# Altium PCB v2.1.1.PcbDoc
Units mm, origin at the board's own origin, x right, y up, seen from the top; angles counter-clockwise.
Board outline 166.23 x 128 mm, 2 copper layers (Top Layer, Bottom Layer); 85 components, 189 nets, 341 pads, 164 vias.
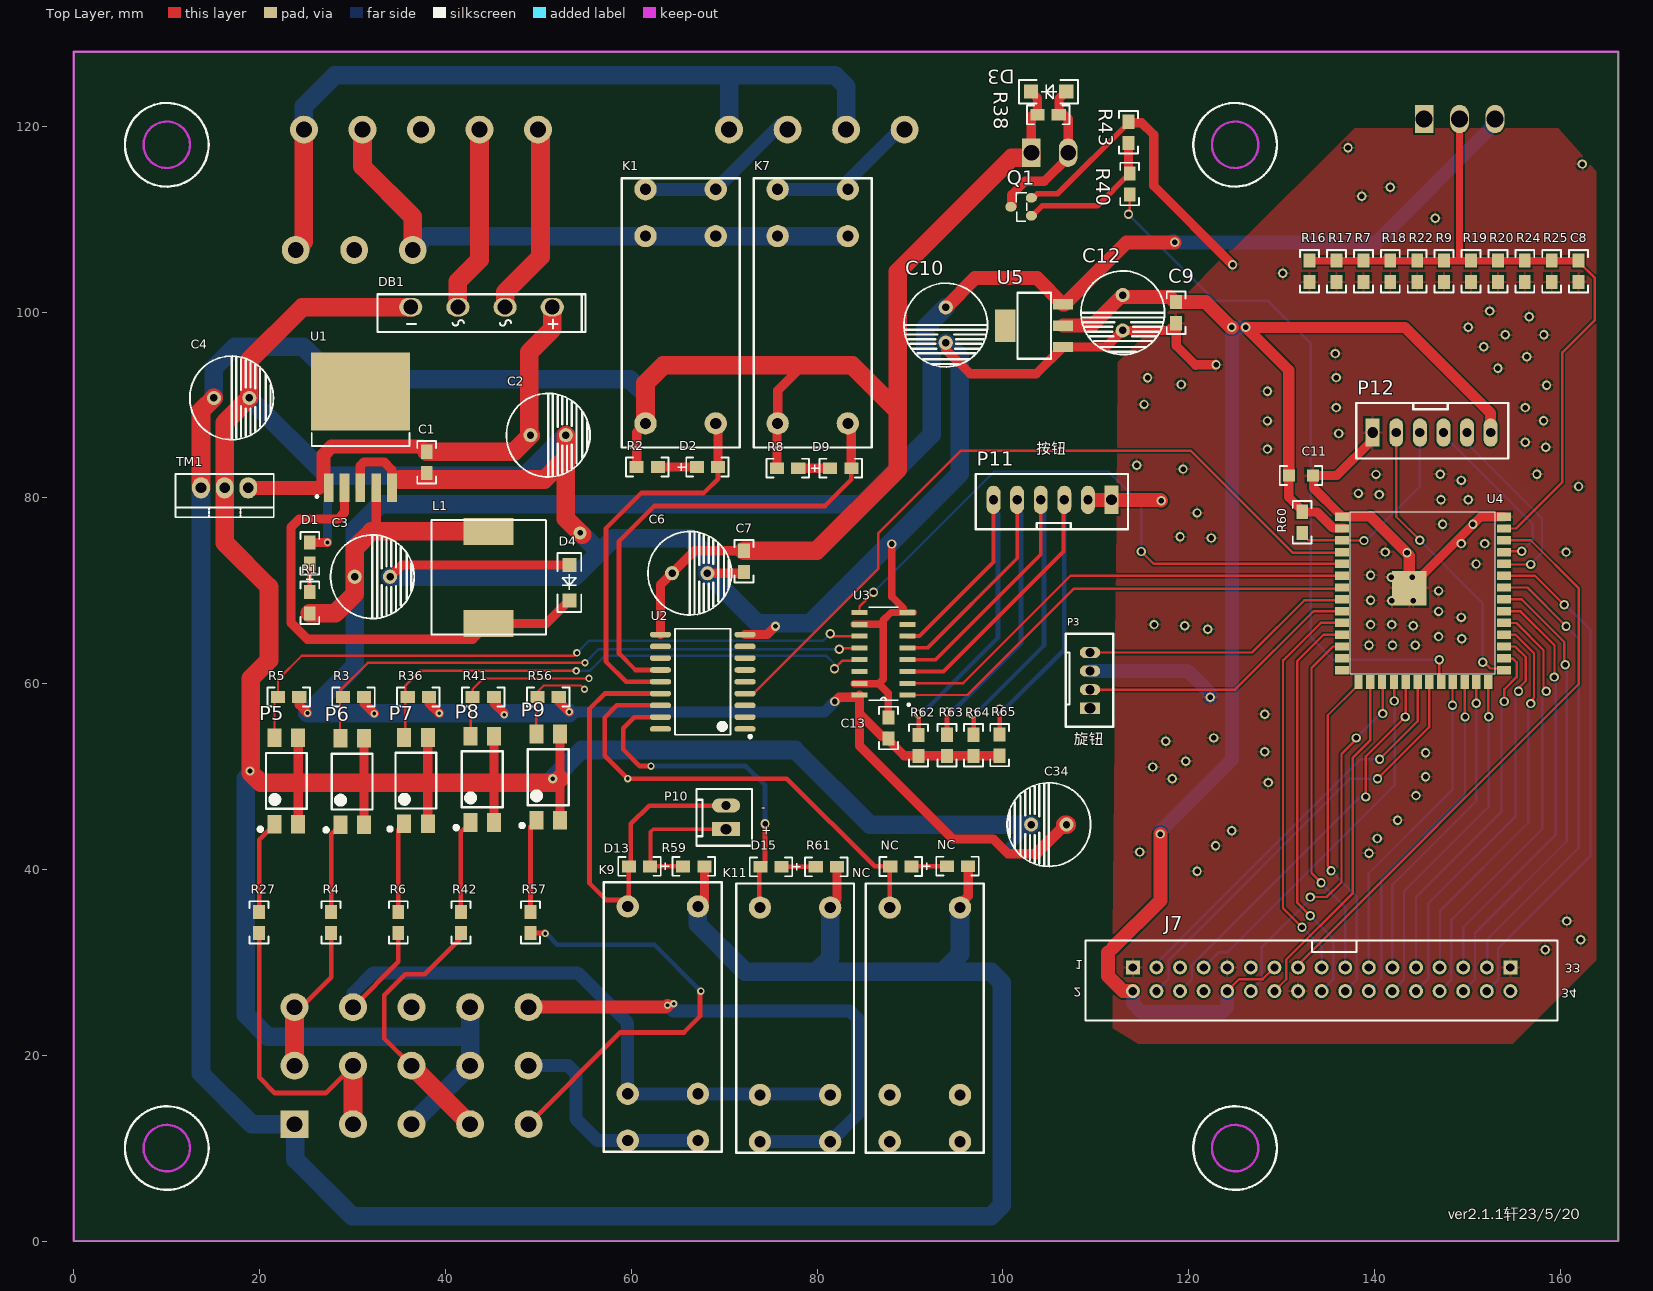
[diagram p0: Top Layer view]
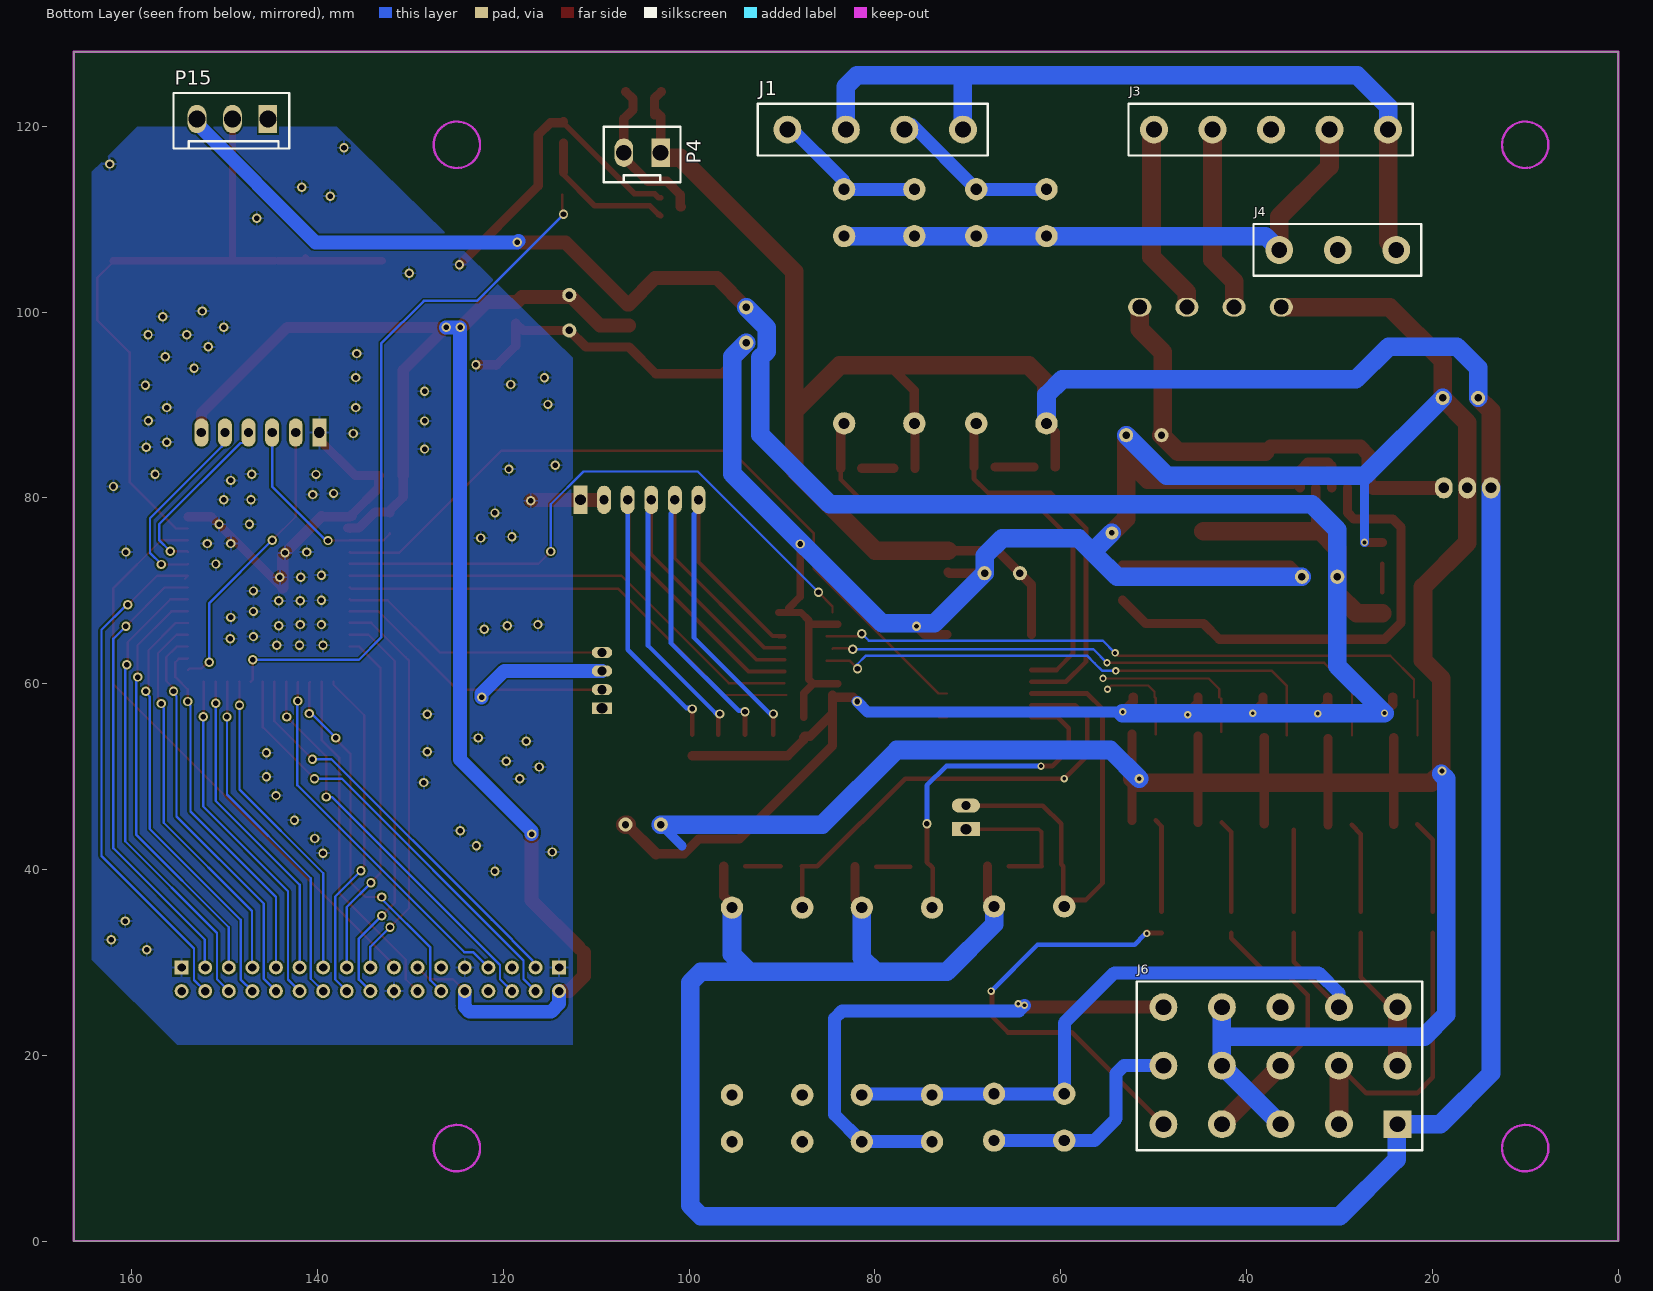
[diagram p1: Bottom Layer view, seen from below]

## Layer stack, top to bottom
Top Solder: solder mask 0.0102, Solder Resist, Dk 3.5
Top Layer: signal copper 0.0356
Dielectric1: dielectric 0.32, FR-4, Dk 4.8
Bottom Layer: signal copper 0.0356
Bottom Solder: solder mask 0.0102, Solder Resist, Dk 3.5

## Board outline
0,0 0,128 166.225,128 166.225,0

## Design rules (kind name [scope] priority, off if disabled: settings)
Clearance [All] p1: gap=0.2 ignorepadtopadclearanceinfootprint=FALSE except(0: Arc-Hole Track-Hole SMDPad-Hole THPad-Hole Via-Hole Fill-Hole Poly-Hole Region-Hole Text-Hole)
ComponentClearance [All] p1 off: gap=0.254 collisioncheckmode=3 verticalgap=0.254 showdistances=FALSE
PlaneConnect [All] p1: planeconnectstyle=Direct reliefexpansion=0.508 reliefentries=4 reliefconductorwidth=0.254 reliefairgap=0.254
PolygonConnect [All] p1: connectstyle=Relief reliefconductorwidth=0.254 reliefentries=4 polygonreliefangle="90 Angle" airgapwidth=0.254
RoutingVias [All] p1: holewidth=0.711 width=1.27 viastyle="Through Hole" minholewidth=0.711 minwidth=1.27 maxholewidth=0.711 maxwidth=1.27
SilkToSolderMaskClearance SilkscreenOverComponentPads [IsPad] p1: minsilkscreentomaskgap=0.254 clearancetoexposedcopper=TRUE
SolderMaskExpansion [All] p1: expansion=0.102 istentingtop=FALSE
Width [All] p1: maxlimit=5 minlimit=0.254 preferedwidth=0.3 minimp=50.000000 maximp=50.000000 favimp=50.000000
27 further rules are at their usual default settings.

## Classes and differential pairs
component class Drive: C1 C2 C3 C4 C6 C7 C8 C9 C10 C12 C34 D1 D2 D3 D4 D9 D13 D15 DB1 J1 J3 J4 J6 K1 K7 K9 K11 L1 P4 P5 P6 P7 P8 P9 P15 Q1 R2 R3 R4 R5 R6 R7 R8 R9 R16 R17 R18 R19 R20 R22 R24 R25 R27 R36 R38 R40 R41 R42 R43 R56 R57 R59 R61 TM1 U1 U2 U5

## Components (designator, comment, footprint, x,y, rotation, side; value= is the part's Value field where it differs from the comment)
C1 "104" 0805#1 37.973,82.677 r90 top
C2 "470UF/50V" CD9 50.8,86.741 r90 top value=470uF
C3 "220uF/50V" CD9 31.877,71.501 r90 top value=470uF
C4 "470UF/50V" CD9 16.725,90.75 r90 top value=470uF
C6 "220uF/50V" CD9 66.04,71.882 r90 top value=470uF
C7 "104" 0805#1 72.136,72.009 r90 top
C8 "103" 0805#1 161.971,103.244 r90 top
C9 "104" 0805#1 118.65,101.075 r270 top
C10 "470UF/50V" CD9 93.85,98.85 r0 top
C11 "104" 0805#2 133.233,82.39 r180 top (schematic designator C3)
C12 "470UF/50V" CD9 112.9,100.175 r0 top locked
C13 "104" 0805#1 87.675,56.361 r270 top (schematic designator C9)
C34 "470UF/50V" CD9 105.199,44.825 r270 top value=470uF
D1 "04" LED-T 25.527,74.041 r90 top
D2 "04" LED-T 68.199,83.185 r0 top
D3 "IN4148" DO-214AC 103.9,124.1 r90 top
D4 "IN5819" DO-214AC 52.959,69.85 r180 top
D9 "04" LED-T 82.55,83.058 r0 top
D13 "04" LED-T 60.885,40.455 r180 top
D15 "04" LED-T 75.037,40.405 r180 top
DB1 "DB157S" LC-GBU 43.875,100.525 r0 top
J1 "CON4" 4PIN-6.3 70.525,119.634 r0 bottom
J3 "变压器入" 5PIN-6.3 24.765,119.634 r0 bottom
J4 "220V供电" 3PIN-6.3 23.876,106.68 r0 bottom
J6 "3*15JR" 3*5PIN-6.3 23.749,12.573 r0 bottom
J7 "header34" "PCBComponent_1 - duplicate" 161.64,140.85 r180 top locked
K1 "HF115F/024-1HS3" HF115FA 69.088,88.011 r90 top
K7 "HF115F/024-1HS3" HF115FA 83.312,88.011 r90 top
K9 "HF115F/024-1HS3" HF115FA 59.615,36.01 r270 top locked
K11 "HF115F/024-1HS3" HF115FA 73.85,35.885 r270 top
L1 "330uH" SMD331 38.481,65.278 r0 top
NC "HF115F/024-1HS3" HF115FA 87.825,35.885 r270 top (schematic designator K11)
NC "04" LED-T 89.025,40.45 r180 top (schematic designator D15)
NC "10k" 0805#1 93.975,40.35 r0 top value=10K (schematic designator R61)
P3 "Header4" "4PIN 2.0" 104.025,55.35 r90 top
P4 "Header 2" "2PIN 3.96" 107.025,117.15 r0 bottom
P5 "PC817" LC-SMD-4 22.875,49.525 r90 top
P6 "PC817" LC-SMD-4 29.95,49.45 r90 top
P7 "PC817" LC-SMD-4 36.825,49.55 r90 top
P8 "PC817" LC-SMD-4 43.95,49.7 r90 top
P9 "PC817" LC-SMD-4 51.05,49.925 r90 top
P10 "Header 2" "2PIN 2.54" 70.2,45.6 r90 top (schematic designator P2)
P11 "Header 6" PCBComponent_1 152.335,79.175 r180 top
P12 "Comment" PCBComponent_1 99.165,87.625 r0 top
P15 "Header 3" "3PIN 3.96" 149.155,120.775 r0 bottom
Q1 "8050" "SOT-23 - duplicate" 101.9,111.275 r90 top
R1 "2K" 0805#1 25.4,69.85 r270 top
R2 "10k" 0805#1 62.865,83.312 r180 top value=10K
R3 "10k" 0805#1 28.956,58.547 r0 top value=10K
R4 "4.7K" 0805#1 27.686,33.147 r90 top
R5 "10k" 0805#1 21.971,58.547 r0 top value=10K
R6 "4.7K" 0805#1 34.925,33.147 r90 top
R7 "47K" 0805#1 138.806,103.244 r90 top
R8 "10k" 0805#1 77.978,83.185 r180 top value=10K
R9 "47K" 0805#1 147.493,103.244 r90 top
R16 "47K" 0805#1 133.015,103.244 r90 top
R17 "47K" 0805#1 135.911,103.244 r90 top
R18 "47K" 0805#1 141.702,103.244 r90 top
R19 "47K" 0805#1 150.389,103.244 r90 top
R20 "47K" 0805#1 153.284,103.244 r90 top
R22 "47K" 0805#1 144.597,103.244 r90 top
R24 "47K" 0805#1 156.18,103.244 r90 top
R25 "47K" 0805#1 159.075,103.244 r90 top
R27 "4.7K" 0805#1 19.939,33.147 r90 top
R36 "10k" 0805#1 35.941,58.547 r0 top value=10K
R38 "10K" 0805#1 106.011,121.225 r180 top value="RT0603BRD071KL YAGEO"
R40 "470" 0805#1 113.65,112.639 r90 top value="RT0603BRD071KL YAGEO"
R41 "10k" 0805#1 42.926,58.547 r0 top value=10K
R42 "4.7K" 0805#1 41.656,33.147 r90 top
R43 "10K" 0805#1 113.525,120.486 r270 top value="RT0603BRD071KL YAGEO"
R56 "10k" 0805#1 49.911,58.547 r0 top value=10K
R57 "4.7K" 0805#1 49.149,33.147 r90 top
R59 "10k" 0805#1 65.584,40.328 r0 top value=10K
R60 "10k" 0805#1 132.219,76.216 r90 top value=10K (schematic designator R59)
R61 "10k" 0805#1 79.863,40.278 r0 top value=10K
R62 "10k" 0805#1 90.925,52.2 r90 top value=10K (schematic designator R60)
R63 "10k" 0805#1 93.988,52.214 r90 top value=10K (schematic designator R60)
R64 "10k" 0805#1 96.85,52.214 r90 top value=10K (schematic designator R60)
R65 "10k" 0805#1 99.65,52.242 r90 top value=10K (schematic designator R60)
TM1 "LM7824CT" TO-220 16.225,81.075 r180 top
U1 "LM2575-5" D2PAK 37.211,89.535 r90 top
U2 "ULN2803" SOP-18_300mil 67.691,60.198 r90 top
U3 "SN74HC165D" 74HC165 87.15,62.575 r180 top
U4 "ESP32-S3-WROOM-1U-N8R8" ESP32-S3-WROOM-1U 141.464,73.393 r0 top locked
U5 "AMS1117-3.3_C166063" SOT-223_L6.7-W3.5-P2.30-BR 103.375,98.525 r0 top

## Footprints (in the part's own frame and the unit in brackets; to place one, negate y for a bottom-side part, rotate by r counter-clockwise, add the part's x,y. Pads: shape width x height; smd on the part's side, far side on the other; paste and mask are expansions set on the pad)
"2PIN 2.54" [mm]
  rect 1.5x3.048 hole 1.143: 1(-1.27,0)
  oval 1.5x3.048 hole 1: 2(1.27,0)
  silkscreen extent -3.05,-2.79 3.05,3.18
"2PIN 3.96" [mm]
  rect 2x3.048 hole 1.7: 1(-3.96,0)
  oval 2x3.048 hole 1.7: 2(0,0)
  silkscreen extent -6.1,-2.79 2.16,3.17
3*5PIN-6.3 [mm]
  rect 3x3 hole 1.7: 1(0,0)
  round 3 hole 1.7: 2(6.3,0) 3(12.6,0) 4(18.9,0) 5(25.2,0) 6(0,-6.3) 7(6.3,-6.3) 8(12.6,-6.3) 9(18.9,-6.3) 10(25.2,-6.3) 11(0,-12.6) 12(6.3,-12.6) 13(12.6,-12.6) 14(18.9,-12.6) 15(25.2,-12.6)
  silkscreen extent -2.67,-15.37 28.07,2.79
"3PIN 3.96" [mm]
  rect 2x3.048 hole 1.8: 1(-3.82,0)
  oval 2x3.048 hole 1.8: 2(0,0) 3(3.82,0)
  silkscreen extent -6.1,-2.79 6.35,3.17
3PIN-6.3 [mm]
  round 3 hole 1.7: 1(0,0) 2(6.3,0) 3(12.6,0)
  silkscreen extent -2.67,-2.79 15.37,2.79
"4PIN 2.0" [mm]
  rect 1.2x2.2 hole 1.143: 1(2,-5.35)
  oval 1.2x2.2 hole 1: 2(4,-5.35) 3(6,-5.35) 4(8,-5.35)
  silkscreen extent 0,-7.85 10,-2.75
4PIN-6.3 [mm]
  round 3 hole 1.7: 1(0,0) 2(6.3,0) 3(12.6,0) 4(18.9,0)
  silkscreen extent -2.67,-2.79 22.1,2.79
5PIN-6.3 [mm]
  round 3 hole 1.7: 1(0,0) 2(6.3,0) 3(12.6,0) 4(18.9,0) 5(25.2,0)
  silkscreen extent -2.67,-2.79 27.94,2.79
74HC165 [mil]
  rect 67x21 smd: CLK(-102,100) CLKINH(102,100) D0(102,-100) D1(102,-50) D2(102,0) D3(102,50) D4(-102,50) D5(-102,0) D6(-102,-50) D7(-102,-100) GND(-102.05,-199.95) LD(-102,150) QH(101.95,-199.95) "QH\""(-102,-150) SER(102,-150) VCC(102,150)
  silkscreen extent -111,-222 63,195
0805#1 [mil]
  rect 60x50 smd: 1(0,0) 2(90,0)
  silkscreen extent -45,-40 135,40
0805#2 [mil]
  rect 51.18x50 smd: 1(-5,0) 2(95,0)
  silkscreen extent -45,-40 135,40
CD9 [mil]
  round 60 hole 31.5: 1(0,65) 2(0,-85)
  silkscreen extent -177,-187 177,167, body extent -181,-191 181,171, height 50
D2PAK [mm] "LM-2575"
  rect 3.05x1.05 smd: 1(-8.451,9.779) 2(-8.451,8.077) 3(-8.451,6.375) 4(-8.451,4.673) 5(-8.451,2.971)
  rect 8.4x10.65 smd: ""(1.899,6.35)
  silkscreen extent -9.52,1.1 -2.57,11.6, body extent -8.7,1.47 5.7,11.47, height 4.21
DO-214AC [mil]
  rect 60x60 smd: 1(-15,-115) 2(-15,35)
  silkscreen extent -65,-165 35,85
ESP32-S3-WROOM-1U [mm]
  rect 1.5x0.9 smd: 1(-4.953,4.572) 2(-4.953,3.302) 3(-4.953,2.032) 40(12.474,4.572) IO0(12.474,-11.938) IO1(12.474,3.302) IO2(12.474,2.032) IO4(-4.953,0.762) IO5(-4.953,-0.508) IO6(-4.953,-1.778) IO7(-4.953,-3.048) IO8(-4.953,-9.398) IO15(-4.953,-4.318) IO16(-4.953,-5.588) IO17(-4.953,-6.858) IO18(-4.953,-8.128) IO19(-4.953,-10.668) IO20(-4.953,-11.938) IO35(12.474,-10.668) IO36(12.474,-9.398) IO37(12.474,-8.128) IO38(12.474,-6.858) IO39(12.474,-5.588) IO40(12.474,-4.318) IO41(12.474,-3.048) IO42(12.474,-1.778) RXD0(12.474,-0.508) TXD0(12.474,0.762)
  rect 3.7x3.7 smd: GND(2.286,-3.118)
  rect 0.9x1.5 smd: IO3(-3.192,-13.207) IO9(-0.652,-13.207) IO10(0.635,-13.208) IO11(1.888,-13.207) IO12(3.175,-13.208) IO13(4.428,-13.207) IO14(5.715,-13.208) IO21(6.968,-13.207) IO45(10.795,-13.208) IO46(-1.905,-13.208) IO47(8.255,-13.208) IO48(9.508,-13.207)
  silkscreen extent -4.06,-12.32 11.56,5.08
HF115FA [mm]
  round 2.4 hole 1.2: 1(20.16,7.56) 2(25.2,7.56) 3(20.16,0) 4(25.2,0) 5(0,7.56) 6(0,0)
  silkscreen extent -2.6,-2.57 26.4,10.13
LC-GBU [mm]
  oval 2.5x2 hole 1.6: 1(-2.54,0) 2(2.54,0) 3(7.62,0) 4(-7.62,0)
  silkscreen extent -11.2,-2.67 11.2,1.4
LC-SMD-4 [mm]
  rect 2x1.5 smd: 1(-4.65,1.27) 2(-4.65,-1.27) 3(4.65,-1.27) 4(4.65,1.27)
  silkscreen extent -5.4,-2.2 3,3, body extent -5.02,-2.42 5.01,2.42, height 3.9
LED-T [mil]
  rect 60x50 smd: 1(-45,5) 2(45,5)
  silkscreen extent -125,-35 90,45, body extent -34,-20 44,30, height 28
PCBComponent_1 [mm]
  rect 1.5x3.048 hole 1.143: 1(40.64,-0.6)
  oval 1.5x3.048 hole 1: 2(43.18,-0.6) 3(45.72,-0.6) 4(48.26,-0.6) 5(50.8,-0.6) 6(53.34,-0.6)
  silkscreen extent 38.86,-3.39 55.24,2.57
"PCBComponent_1 - duplicate" [mm]
  round 1.5 hole 0.9: 3V3(37.49,113.95) 3V3(47.65,113.95) CS(29.87,113.95) D0(9.55,113.95) D1(9.55,111.41) D2(12.09,113.95) D3(12.09,111.41) D4(14.63,113.95) D5(14.63,111.41) D6(17.17,113.95) D7(17.17,111.41) D8(19.71,113.95) D9(19.71,111.41) D10(22.25,113.95) D11(22.25,111.41) D12(24.79,113.95) D13(24.79,111.41) D14(27.33,113.95) D15(27.33,111.41) INT(40.03,111.41) NC(7.01,113.95) NC(34.95,111.41) NC(40.03,113.95) PS(37.49,111.41) RD(32.41,111.41) RS(29.87,111.41) RST(34.95,113.95) SCL(45.11,111.41) SDA(45.11,113.95) T_IN(42.57,111.41) WAT(42.57,113.95) WR(32.41,113.95)
  rect 1.5x1.5 hole 0.9: GND(7.01,111.41) GND(47.65,111.41)
  silkscreen extent 1.93,108.49 52.73,117.13
SMD331 [mm]
  rect 5.4x2.9 smd: 1(6.15,1.2) 2(6.15,11.1)
  silkscreen extent 0,0 12.32,12.32
SOP-18_300mil [mm]
  oval 0.6x2.3 smd: 1(-5.08,-4.55) 2(-3.81,-4.55) 3(-2.54,-4.55) 4(-1.27,-4.55) 5(0,-4.55) 6(1.27,-4.55) 7(2.54,-4.55) 8(3.81,-4.55) 9(5.08,-4.55) 10(5.08,4.55) 11(3.81,4.55) 12(2.54,4.55) 13(1.27,4.55) 14(0,4.55) 15(-1.27,4.55) 16(-2.54,4.55) 17(-3.81,4.55) 18(-5.08,4.55)
  silkscreen extent -6.05,-5.25 5.7,3
"SOT-23 - duplicate" [mil]
  oval 40x47.24 smd: B(-35.98,-45.98) C(2.01,40.98) E(40,-45.98)
  silkscreen extent -59,-26 62,18
SOT-223_L6.7-W3.5-P2.30-BR [mm]
  rect 2.2x1.1 smd: 1(3.099,-2.3) 2(3.099,0) 3(3.099,2.3)
  rect 2.2x3.5 smd: 4(-3.099,0)
  silkscreen extent -1.8,-3.55 1.8,3.55
TO-220 [mil]
  oval 75x90 hole 45: 1(-100,0) 2(0,0) 3(100,0)
  silkscreen extent -208,-58 208,125

## Part data
C1 C7 C8 C11: library part Cap, "Capacitor", LatestRevisionDate=17-Jul-2002, LatestRevisionNote="Re-released for DXP Platform.", PackageReference=RAD-0.3, Published=8-Jun-2000, Publisher="Altium Limited"
C2 C3 C4 C6 C34: library part "Cap Pol1", "Polarized Capacitor (Radial)", LatestRevisionDate=17-Jul-2002, LatestRevisionNote="Re-released for DXP Platform.", PackageReference=RB7.6-15, Published=8-Jun-2000, Publisher="Altium Limited"
C9 C13: library part CAP
C10 C12: library part ECAP
D1 D2 D9 D13 D15 NC: library part LED0, "Typical INFRARED GaAs LED", LatestRevisionDate=08-Jul-2005, LatestRevisionNote="Mech Layer 1 removed.", PackageDescription="LED; 2 Leads", PackageReference=LED-0, Published=8-Jun-2000, Publisher="Altium Limited"
D3 D4: library part "D Zener", "Zener Diode", LatestRevisionDate=17-Jul-2002, LatestRevisionNote="Re-released for DXP Platform.", PackageReference=DIODE-0.7, Published=8-Jun-2000, Publisher="Altium Limited"
DB1: library part BRIDGE2
J1: "Connector"
J3: library part CON5, "Connector"
J4: library part CON3, "Connector"
J6: library part Component_1
J7: "Header, 34-Pin2.54MM"
K1 K7 K9 K11 NC: library part RELAY-DPST
L1: library part Inductor, "Inductor", Code_IEC=1005, Code_JEITA=0402, LatestRevisionDate=29-May-2009, LatestRevisionNote="IPC-7351 Footprint Added.", PackageDescription="Chip Inductor", PackageReference=0402-A, Published=8-Jun-2000, Publisher="Altium Limited"
NC R1 R2 R3 R4 R5 R6 R7 R8 R9 R16 R17 R18 R19 R20 R22 R24 R25 R27 R36 R38 R40 R41 R42 R43 R56 R57 R59 R60 R61 R62 R63 R64 R65: library part Res2, "Resistor", LatestRevisionDate=17-Jul-2002, LatestRevisionNote="Re-released for DXP Platform.", PackageReference=AXIAL-0.4, Published=8-Jun-2000, Publisher="Altium Limited"
P3: "Header, 4-Pin2MM"
P4 P10: "Header, 2-Pin", LatestRevisionDate=17-Jul-2002, LatestRevisionNote="Re-released for DXP Platform.", Publisher="Altium Limited"
P5 P6 P7 P8 P9: library part P521
P15: "Header, 3-Pin", LatestRevisionDate=17-Jul-2002, LatestRevisionNote="Re-released for DXP Platform.", Publisher="Altium Limited"
Q1: library part BC817-8050
U1: library part LM2575
U5: library part AMS1117-1.5_C166063, BOM_LCSC Assembly=Yes, BOM_Manufacturer=SK, BOM_Manufacturer Part=AMS1117-1.5, BOM_Supplier=LCSC, BOM_Supplier Part=C166063, Contributor=LCSC, SMT Type=Extend, spicePre=U

## Via types
v1: diameter 1, hole 0.6, Top Layer to Bottom Layer, 143 vias
v2: diameter 0.8, hole 0.4, Top Layer to Bottom Layer, tented both sides, 17 vias
v3: diameter 1, hole 0.5, Top Layer to Bottom Layer, tented both sides, 3 vias
v4: diameter 1.4, hole 0.6, Top Layer to Bottom Layer, tented both sides, 1 vias

## Nets (pads, with @x,y where several pads share a name; then routed paths per layer and width w, separated by ;. In a path a pad name is that pad's centre, name@x,y a point inside that pad or via, vN(x,y) a via of type N, cw(c..) or ccw(c..) an arc to the next point about the centre after c; other vN are vias at no path point)
165_CLK: U3.CLK U4.IO6 | length 51.6
  Top Layer w0.254: U3.CLK@89.741,60.04 95.719,60.04 107.294,71.615 U4.IO6
165_LD: U3.LD U4.IO7 | length 51.8
  Top Layer w0.254: U3.LD@89.525,58.77 96.195,58.77 107.65,70.225 136.391,70.225 U4.IO7
165_QH: U3.QH U4.IO5 | length 65.7
  Top Layer w0.254: U3.QH 84.561,68.311 v1(86.075,69.825) ; v1(114.9,74.221) 116.236,72.885 U4.IO5
  Bottom Layer w0.254: v1(86.075,69.825) 99.075,82.825 111.381,82.825 114.9,79.306 v1(114.9,74.221)
485-EN: 
485-RXD: 
485-TXD: 
+3.3V: C9.1 C11.2 C12.1 J7.3V3 J7.RD P12.6 R60.2 U4.2 U5.2 | length 181.3
  Top Layer w0.254: 111.325,31.05 111.825,31.55 ; J7.3V3@113.99,26.743 J7.3V3@113.99,26.9 ; J7.3V3@124.15,26.9 125.42,28.17 127.96,28.17 J7.RD J7.RD@129.23,29.555
  Top Layer w1: C11.2@130.775,82.39 130.775,80.073 132.084,78.764 132.219,78.629 R60.2 ; R60.2@132.219,78.375 R60.2 ; R60.2@132.393,78.502 R60.2@132.316,78.502 ; U4.2 U4.2@136.461,76.745 ; U4.2@136.753,76.745 U4.2@136.461,76.745 ; R60.2 R60.2@132.316,78.502 ; R60.2@132.316,78.502 132.354,78.464 133.822,78.464 135.541,76.745 U4.2@136.461,76.745
  Top Layer w1.2: C11.2@130.775,82.39 130.775,93.725 v1(126.15,98.35) 143.3,98.35 152.505,89.145 P12.6
  Top Layer w1.5: U5.2 109.599,98.525 C12.1 112.906,101.826 113.107,101.625 117.997,101.625 118.547,101.075 C9.1 121.825,101.075 124.55,98.35 v1(124.65,98.35) ; 111.325,31.05 111.325,28.5 112.925,26.9 J7.3V3@113.99,26.9 ; 111.825,31.55 116.95,36.675 v1(116.95,43.8)
  Bottom Layer w1.5: J7.3V3@113.99,26.9 113.99,25.554 114.869,24.675 123.625,24.675 124.15,25.2 ; v1(116.95,43.8) 116.95,44.15 124.65,51.85 v1(124.65,98.35) v1(126.15,98.35) ; 124.15,25.45 J7.3V3@124.15,26.9
AC24L: DB1.1 J3.4 | length 20.1
  Top Layer w2: DB1.1 41.335,103.285 43.665,105.615 J3.4
AC24N: DB1.2 J3.5 | length 20.8
  Top Layer w2: DB1.2 46.415,102.14 50.225,105.95 50.225,119.374 J3.5
AC230_L: J1.1 J1.3 J3.1 J4.1 | length 85.6
  Top Layer w2: J4.1 24.765,107.569 J3.1
  Bottom Layer w2: J3.1 24.765,122.14 28.1,125.475 70.275,125.475 ; J1.1@70.525,120.175 70.525,125.225 70.275,125.475 ; J1.3@83.125,120.175 83.125,124.275 81.925,125.475 70.275,125.475
AC230_N: J3.2 J4.3 K1.1 K1.3 K7.1 K7.3 | length 62.6
  Top Layer w2: J3.2 31.065,115.66 36.476,110.249 J4.3
  Bottom Layer w2: J4.3 37.967,108.171 K1.1 K1.3 K7.1 K7.3
ACOUTA: J1.2 K1.2 K1.4 | length 18.2
  Bottom Layer w1.4: K1.2 K1.4 76.052,120.175 J1.2@76.825,120.175
ACOUTB: J1.4 K7.2 K7.4 | length 17.1
  Bottom Layer w1.4: K7.2 K7.4 83.312,114.062 J1.4@89.425,120.175
ADC_NTC: 
ADC_ON: 
AREF: 
ASW_1: D2.2 K1.6 U2.14 | length 41.5
  Top Layer w0.5: U2.14 59.436,60.198 57.277,62.357 57.277,76.708 61.087,80.518 67.818,80.518 69.342,82.042 D2.2
  Top Layer w1: K1.6 69.342,87.757 D2.2
ASW_2: D9.2 K7.6 U2.13 | length 51.2
  Top Layer w0.5: U2.13 60.452,61.468 58.674,63.246 58.674,75.311 62.484,79.121 80.846,79.121 83.693,81.968 D9.2
  Top Layer w1: K7.6 83.693,87.63 D9.2
AVCC: 
BOOT: P12.2 U4.IO0 | length 31.2
  Top Layer w0.254: P12.2 142.345,77.965 v1(144.885,75.425) ; v1(151.638,62.29) 151.837,62.29 152.502,61.625 153.768,61.625 U4.IO0
  Bottom Layer w0.254: v1(144.885,75.425) 151.638,68.672 v1(151.638,62.29)
BU1: P11.6 R62.2 U3.D7 | length 48.5
  Top Layer w0.4: U3.D7@90.325,65.115 91.01,65.115 98.995,73.1 P11.6
  Top Layer w0.5: U3.D7 U3.D7@90.325,65.115 ; R62.2 v1(90.925,56.739)
  Bottom Layer w0.5: v1(90.925,56.739) 91.021,56.835 91.365,56.835 99.475,64.945 99.475,78.25 98.995,78.73 P11.6
BU2: P11.5 R63.2 U3.D6 | length 50.9
  Top Layer w0.4: U3.D6 91.895,63.845 101.535,73.485 P11.5
  Top Layer w0.5: R63.2 v1@93.988,56.739
  Bottom Layer w0.5: v1(93.988,56.975) 94.076,57.063 94.668,57.063 101.95,64.345 101.95,78.315 101.535,78.73 P11.5
BU3: P11.4 R64.2 U3.D5 | length 53.8
  Top Layer w0.4: U3.D5 92.75,62.575 104.075,73.9 P11.4
  Top Layer w0.5: v1(96.699,56.739) 96.85,56.588 R64.2
  Bottom Layer w0.5: v1(96.699,56.739) 96.795,56.835 97.16,56.835 104.425,64.1 104.425,78.38 104.075,78.73 P11.4
BU4: P11.3 R65.2 U3.D4 | length 55.9
  Top Layer w0.4: U3.D4 93.605,61.305 106.521,74.221 P11.3@106.521,79.681
  Top Layer w0.5: R65.2 v1@99.65,56.975 ; P11.3@106.521,79.681 P11.3
  Bottom Layer w0.5: v1(99.65,57.275) 99.746,57.371 100.321,57.371 106.615,63.665 P11.3
BZ1: R40.1 U4.IO14 | length 76.6
  Top Layer w0.254: v1@113.46,110.442 v1(113.525,110.507) 113.65,110.632 R40.1 ; v1(146.975,62.575) 146.975,60.389 U4.IO14
  Bottom Layer w0.254: v1(113.525,110.507) 122.832,101.2 128.55,101.2 133.15,96.6 133.15,64.975 135.55,62.575 v1(146.975,62.575)
D0: J7.D0 U4.IO42 | length 56
  Top Layer w0.254: J7.D0 J7.D0@152.09,27.237 ; U4.IO42@154.261,71.292 U4.IO42 157.285,71.615 v1(160.425,68.475)
  Bottom Layer w0.254: J7.D0 153.3,28.11 153.3,31.5 163.25,41.45 163.25,65.8 160.575,68.475 v1(160.425,68.475)
D1: J7.D1 U4.IO41 | length 49.8
  Top Layer w0.254: U4.IO41 156.455,70.345 v1(160.625,66.175)
  Bottom Layer w0.254: J7.D1 152.125,29.475 152.125,32.425 161.971,42.271 161.971,64.829 v1(160.625,66.175)
D2: J7.D2 U4.IO40 | length 50.7
  Top Layer w0.254: U4.IO40 155.836,69.075 160.425,64.486 160.425,62.15 v1(160.537,62.037)
  Bottom Layer w0.254: J7.D2 150.825,28.175 150.825,33.15 160.7,43.025 160.7,61.516 160.68,61.535 160.68,61.895 v1(160.537,62.037)
D3: J7.D3 U4.IO39 | length 45.8
  Top Layer w0.254: U4.IO39 153.968,67.775 155.725,67.775 159.375,64.125 159.375,60.725 v1(159.35,60.7)
  Bottom Layer w0.254: J7.D3 149.55,33.775 159.493,43.718 159.493,60.557 v1(159.35,60.7)
D4: J7.D4 U4.IO38 | length 47
  Top Layer w0.254: U4.IO38 153.948,66.525 155.275,66.525 158.2,63.6 158.2,59.652 158.475,59.377 v1(158.475,59.175)
  Bottom Layer w0.254: J7.D4 148.275,28.165 148.275,34.575 158.05,44.35 158.05,58.578 158.475,59.003 v1(158.475,59.175)
D5: J7.D5 U4.IO37 | length 42.3
  Top Layer w0.254: U4.IO37 155.185,65.265 157.175,63.275 157.175,58.475 v1@156.478,57.778
  Bottom Layer w0.254: J7.D5 147.05,29.48 147.05,35.525 156.55,45.025 156.55,57.373 156.825,57.648 v1(156.825,57.85)
D6: J7.D6 U4.IO36 | length 43.9
  Top Layer w0.254: J7.D6 J7.D6@144.47,27.195 ; U4.IO36 155.13,63.995 156.275,62.85 156.275,60.275 155.643,59.643 155.643,59.318 v1(155.5,59.175)
  Bottom Layer w0.254: J7.D6 145.775,28.205 145.775,36.3 155.175,45.7 155.175,58.648 155.5,58.973 v1(155.5,59.175)
D7: J7.D7 U4.IO35 | length 39
  Top Layer w0.254: J7.D7 J7.D7@144.525,29.495 ; U4.IO35 153.993,62.67 154.92,62.67 155.3,62.29 155.3,60.7 153.975,59.375 v1(153.975,58.075)
  Bottom Layer w0.254: J7.D7 144.47,37.025 153.675,46.23 153.675,57.573 153.975,57.873 v1(153.975,58.075)
D8: J7.D8 U4.IO45 | length 37.8
  Top Layer w0.254: J7.D8 J7.D8@142.1,26.9 ; U4.IO45 152.259,56.466 v1(152.292,56.433) v1@152.325,56.4
  Bottom Layer w0.254: J7.D8 143.175,28.145 143.175,37.65 152.292,46.767 v1(152.292,56.433)
D9: J7.D9 U4.IO48 | length 34.6
  Top Layer w0.254: J7.D9 J7.D9@142.006,29.516 ; v1@150.925,57.85 v1(150.948,57.874) 150.972,57.897 U4.IO48
  Bottom Layer w0.254: J7.D9 141.93,38.355 150.948,47.373 v1(150.948,57.874)
D10: J7.D10 U4.IO47 | length 37.6
  Top Layer w0.254: J7.D10 J7.D10@139.45,26.9 ; U4.IO47 149.719,56.445 v1(149.75,56.414)
  Bottom Layer w0.254: J7.D10 140.725,28.235 140.725,39.05 149.75,48.075 v1(149.75,56.414)
D11: J7.D11 U4.IO21 | length 34.5
  Top Layer w0.254: v1(148.4,57.675) 148.4,60.154 U4.IO21
  Bottom Layer w0.254: J7.D11 139.39,39.584 148.4,48.594 v1(148.4,57.675)
D12: J7.D12 U4.IO3 | length 36.5
  Top Layer w0.254: v1(135.325,39.85) 135.325,40.022 134.975,40.372 134.975,56.589 138.272,59.886 U4.IO3 ; J7.D12 J7.D12@136.9,26.9
  Bottom Layer w0.254: v1(135.325,39.85) 138.1,37.075 138.1,28.15 J7.D12
D13: J7.D13 U4.IO8 | length 38
  Top Layer w0.254: v1(134.25,38.55) 134.25,38.575 133.225,39.6 133.225,61.675 135.545,63.995 U4.IO8
  Bottom Layer w0.254: v1(134.25,38.55) 136.85,35.95 J7.D13
D14: J7.D14 U4.IO18 | length 43.8
  Top Layer w0.254: v1(133.1,35) 131.675,36.425 131.675,62.415 134.525,65.265 U4.IO18 ; J7.D14 J7.D14@134.45,26.9
  Bottom Layer w0.254: v1(133.1,35) 135.55,32.55 135.55,28.14 J7.D14
D15: J7.D15 U4.IO17 | length 42.8
  Top Layer w0.254: v1(132.2,33.775) 130.15,35.825 130.15,62.475 130.5,62.825 134.21,66.535 U4.IO17
  Bottom Layer w0.254: v1(132.2,33.775) 134.31,31.665 J7.D15
DATA_INA: 
DATA_INB: 
DATA_OUT: 
DC: J7.RS U4.IO2 | length 63.5
  Top Layer w0.254: J7.RS 131.77,29.72 161.971,59.921 161.971,70.279 156.825,75.425 U4.IO2
DC24V: C4.1 C6.1 C7.2 D3.2 J6.1 K1.5 K7.5 K9.5 K11.5 NC.2@96.261,40.35 NC.5 P4.1 R2.2 R8.2 R38.2 R59.2 R61.2 TM1.3 U2.10 | length 451.1
  Top Layer w1: R2.2 60.579,87.062 K1.5 ; U2.10 63.141,70.634 C6.1 66.802,74.295 C7.2 ; K9.5 67.87,36.705 R59.2 ; R8.2 75.692,87.951 K7.5 75.752,91.552 78.45,94.25 ; K11.5@81.327,35.96 82.149,36.782 R61.2 ; NC.5 95.385,36.264 96.261,37.14 NC.2@96.261,40.35 ; D3.2 103.725,123.005 R38.2 ; P4.1 103.065,121.076 R38.2@103.47,121.48
  Top Layer w2: TM1.3 13.685,89.361 C4.1 ; K1.5 61.528,92.328 63.45,94.25 78.45,94.25 83.775,94.25 88.7,89.325 ; C7.2 79.945,74.295 88.7,83.05 88.7,89.325 ; P4.1 103.065,116.626 100.976,116.626 88.7,104.35 88.7,89.325
  Bottom Layer w2: TM1.3 13.685,18.04 19.152,12.573 J6.1 23.85,12.472 23.85,8.775 29.95,2.675 98.728,2.675 99.9,3.847 99.9,27.803 98.728,28.975 93.5,28.975 ; C4.1 15.074,93.999 17.35,96.275 24.7,96.275 28.225,92.75 59.85,92.75 61.528,91.072 K1.5 ; K9.5 67.175,34.075 72.275,28.975 79.925,28.975 ; K11.5 81.41,30.46 79.925,28.975 ; NC.5 95.385,30.86 93.5,28.975 ; 79.925,28.975 93.5,28.975
E+3.3V: 
EN: P12.3 R60.1 U4.3 | length 21.2
  Top Layer w0.254: R60.1 132.219,76.089 132.883,75.425 U4.3 136.536,75.4 v1(138.875,75.4)
  Bottom Layer w0.254: v1@138.975,75.3 144.885,81.21 P12.3
EP_CLK: 
EP_DIO: 
EP_STB: 
EVCC: 
GND: C1.1 C2.2 C3.2 C4.2 C6.2 C7.1 C8.1 C9.2 C10.2 C11.1 C12.2 C13.1 C34.2 D1.2 D4.1 DB1.4 J6.3 J6.9 J6.14 J7.CS J7.GND J7.PS P3.3 P5.2 P5.3 P6.2 P6.3 P7.2 P7.3 P8.2 P8.3 P9.2 P9.3 P11.1 P11.2 P12.1 Q1.E R7.1 R9.1 R16.1 R17.1 R18.1 R19.1 R20.1 R22.1 R24.1 R25.1 R43.1 TM1.2 U1.3 U1.5 U2.9 U3.CLKINH U3.GND U3.SER U4.1 U4.40 U4.GND U5.1 | length 643.9
  Top Layer w0.254: J7.CS J7.CS@131.77,27.03
  Top Layer w0.6: Q1.E 103.273,112.291 103.707,112.725 105.891,112.725 113.525,120.359 R43.1
  Top Layer w0.8: U3.CLKINH@83.975,60 86.656,60 ; U3.SER@83.975,66.385 U3.SER 87.125,66.385 ; C13.1 87.675,58.981 86.656,60 ; v1(88.025,75.025) 88.025,69.371 89.291,68.105 89.291,67.787 U3.GND@89.425,67.654 ; U3.GND@90.35,67.654 U3.GND U3.GND@89.425,67.654 ; 86.656,60 87.125,60.469 87.125,66.385 ; 87.125,66.385 87.125,66.825 87.954,67.654 U3.GND@89.425,67.654
  Top Layer w1: P5.2 24.145,49.325 P5.3 ; D1.2 27.284,75.184 v2(27.3,75.2) ; U1.3 30.836,83.461 31.225,83.85 33.4,83.85 34.225,83.025 34.225,81.099 U1.5 35.128,81.972 ; P6.2 31.22,49.325 P6.3 ; C3.2 35.306,72.771 D4.1 ; P7.2 38.095,49.325 P7.3 ; P8.2 45.22,49.325 P8.3 ; P9.2 52.32,49.775 P9.3 ; C6.2 72.009,71.882 C7.1 ; U2.9 74.628,65.278 v3(75.525,66.175) ; C10.2 93.85,95.975 96.475,93.35 103.599,93.35 U5.1 111.109,96.225 C12.2 117.877,98.016 C9.2 118.65,96.378 120.703,94.325 ; R43.1 113.64,120.371 114.929,120.371 116.225,119.075 116.225,113.6 v1(124.725,105.1) ; 120.771,94.257 120.703,94.325 ; v1(122.95,94.325) 120.703,94.325 ; U4.1@136.261,78.015 136.261,78.215 133.426,81.05 133.426,82.324 C11.1 135.944,82.39 139.805,86.251 P12.1 ; U4.1 139.559,77.965 ; U4.GND 151.44,77.965 U4.40
  Top Layer w1.2: 139.559,77.965 143.75,73.774 U4.GND
  Top Layer w1.5: P11.2 P11.1 116.947,79.775 v1(117.041,79.681)
  Top Layer w2: 35.128,81.972 50.647,81.972 52.5,83.825 ; DB1.4 24.6,100.525 18.884,94.809 C4.2 16.225,88.091 TM1.2 16.225,75.175 21,70.4 21,62.5 19.05,60.55 19.05,50.375 20.1,49.325 24.145,49.325 31.22,49.325 38.095,49.325 45.22,49.325 51.87,49.325 52.32,49.775 ; C2.2 52.959,77.766 v4@54.7,76.025
  Bottom Layer w1: 27.259,82.375 27.3,82.334 v2(27.3,75.2) ; 100.775,42.56 C34.2
  Bottom Layer w1.5: P3.3 119.9,61.35 122.325,58.925 v1(122.325,58.523)
  Bottom Layer w2: C4.2 27.259,82.375 48.593,82.375 C2.2 ; v3@19.025,50.275 18.5,49.75 18.5,24.375 20.875,22 42.649,22 ; C3.2 53.926,71.501 56.325,73.9 ; J6.3 J6.9 42.649,22 ; J6.14 42.649,22 ; v3(51.55,49.75) 54.65,52.85 77.63,52.85 85.655,44.825 C34.2 ; v4(54.5,76.225) 56.325,74.4 56.325,73.9 ; C10.2 95.35,95.191 95.35,82.6 79.225,66.475 73.606,66.475 C6.2 68.199,73.751 66.3,75.65 58.075,75.65 56.325,73.9
  other v1: 158.383,31.362 162.207,32.425 160.7,34.437 120.9,39.8 139.408,41.748 114.725,41.875 122.897,42.56 140.3,43.325 124.65,44.175 142.483,45.3 144.47,47.947 128.55,49.35 118.24,49.75 145.5,49.975 116.125,51.025 119.675,51.65 145.5,52.556 128.175,52.661 117.525,53.797 122.7,54.15 128.175,56.717 139.408,64.125 141.942,64.125 144.386,64.125 149.397,64.829 146.9,65.065 122.05,65.85 119.58,66.23 144.179,66.23 116.272,66.358 139.581,66.358 141.866,66.358 149.325,67.125 146.9,67.769 141.866,68.907 144.179,68.907 139.581,68.974 146.9,69.975 141.8,71.45 144.055,71.45 139.581,71.675 150.932,72.875 143.496,74.075 141.161,74.155 160.625,74.155 149.325,75.072 151.874,75.072 122.425,75.675 119.073,75.802 147.328,77.15 150.595,77.15 120.9,78.375 147.158,79.8 150.079,79.8 140.522,80.347 138.272,80.469 161.971,81.213 149.325,81.872 140.162,82.517 147.075,82.55 157.483,82.55 119.397,83.096 114.401,83.501 128.475,85.247 158.45,85.45 156.214,85.988 136.15,86.925 128.475,88.278 158.2,88.308 135.875,89.716 156.214,89.716 115.2,90.05 128.475,91.465 158.525,92.125 119.2,92.2 115.574,92.935 135.875,92.944 153.284,93.934 156.4,95.175 135.775,95.525 151.75,96.25 154.077,97.543 158.24,97.543 150.079,98.35 156.65,99.5 152.395,100.1 130.134,104.172 146.535,110.087 138.638,112.475 141.7,113.425 162.375,115.925 137.15,117.675
  other v3: 18.95,50.6
IN1A: 
IN1B: 
IN2A: 
IN2B: 
INT: J7.INT U4.IO10 | length 39.8
  Top Layer w0.254: U4.IO10 142.125,60.159 v1(142.125,58.125)
  Bottom Layer w0.254: J7.INT 123.27,31.1 124.2,31.1 142.175,49.075 142.175,58.075 v1(142.125,58.125)
L_TER: C8.2 P15.2 R7.2 R9.2 R16.2 R17.2 R18.2 R19.2 R20.2 R22.2 R24.2 R25.2 U4.IO1 | length 79
  Top Layer w0.254: U4.IO1 155.22,76.695 160.225,81.7 160.225,95.65 163.725,99.15 163.725,103.649 161.971,105.403 C8.2 ; 154.4,105.68 154.55,105.53
  Top Layer w0.8: R16.2 R17.2 R7.2 140.991,105.53 ; R18.2@141.294,105.834 140.991,105.53 ; R22.2@144.235,105.53 R18.2 141.294,105.53 140.991,105.53 ; R22.2 R9.2 148.941,105.53 ; P15.2@149.15,120.883 149.15,105.739 148.941,105.53 ; C8.2 R25.2 R24.2 154.55,105.53 R20.2 R19.2 148.941,105.53
LIN_B1: P5.4 R5.1 U3.D0 | length 71
  Top Layer w0.254: P5.4@21.59,54.434 R5.1@21.59,58.166 ; R5.1 21.971,60.427 24.536,62.992 53.842,62.992 v2(54.15,63.3) ; v1(81.407,65.375) 81.609,65.375 81.869,65.115 U3.D0 U3.D0@85.175,65.115
  Bottom Layer w0.254: v2(54.15,63.3) 55.475,64.625 80.657,64.625 v1(81.407,65.375)
LIN_B2: P6.4 R3.1 U3.D1 | length 62.6
  Top Layer w0.254: P6.4@28.639,54.434 28.639,59.245 31.623,62.23 v2(55.016,62.23) ; v1(82.4,63.7) 82.498,63.798 84.507,63.798 U3.D1@84.559,63.745
  Bottom Layer w0.254: v2(55.016,62.23) 56.486,63.7 v1(82.4,63.7)
LIN_B3: P7.4 R36.1 U3.D2 | length 57
  Top Layer w0.254: P7.4@35.687,54.434 35.687,59.792 37.262,61.366 v2(54.073,61.366) ; v1(81.875,61.6) 82.75,62.475 U3.D2@85.175,62.475
  Bottom Layer w0.254: v2(54.073,61.366) 55.516,61.366 56.35,62.2 57.161,63.011 80.976,63.011 v1@81.955,62.032
LIN_B4: P8.4 R41.1 | length 17.4
  Top Layer w0.254: P8.4@42.735,54.815 R41.1@42.735,58.356 ; R41.1 42.926,59.411 44.069,60.554 v2(55.448,60.554)
LIN_B5: P9.4 R56.1 | length 10.1
  Top Layer w0.254: P9.4@49.784,54.561 49.784,58.42 R56.1 49.911,59.131 50.571,59.792 54.559,59.792 v2(54.966,59.385)
LROUT5: 
LROUT6: 
LROUT7: 
LROUT8: 
LSW_A1: D13.2 K9.6 P10.2 U2.15 | length 53
  Top Layer w0.5: U2.15 57.15,58.928 55.499,57.277 55.499,38.526 57.322,36.703 K9.6@59.742,36.703 ; P10.2 61.925,46.87 59.955,44.9 59.955,40.541 D13.2 K9.6@59.742,36.703 ; K9.6@59.742,36.703 59.817,36.703 K9.6 59.742,36.137 K9.6@59.742,36.703
LSW_A2: NC.2@87.882,40.323 NC.6 U2.16 | length 50.8
  Top Layer w0.5: U2.16 58.458,57.658 57.15,56.35 57.15,52.24 v2(59.615,49.775) 76.75,49.775 86.202,40.323 87.882,40.323 87.825,40.266 NC.6
LSW_A3: D15.2 K11.6 U2.17 | length 37
  Top Layer w0.5: v2(62.125,51.125) 60.932,51.125 59.15,52.907 59.15,55.2 60.338,56.388 U2.17 ; K11.6@73.767,35.96 73.767,40.151 D15.2 74.4,40.784 v1(74.4,44.9)
  Bottom Layer w0.5: v2(62.125,51.125) 72.325,51.125 74.4,49.05 v1(74.4,44.9)
MD1_A: 
MD1_B: 
MD2_A: 
MD2_B: 
MD_DC12V: 
NetBT1_1: 
NetC1_2: C1.2 C2.1 DB1.3 TM1.1 U1.1 | length 50.2
  Top Layer w1: C2.1 C2.1@49.403,86.995
  Top Layer w1.5: TM1.1 26.325,81.075 26.85,81.6 26.85,84.625 27.725,85.5 37.436,85.5 C1.2
  Top Layer w2: C1.2 47.371,84.963 C2.1 49.025,86.865 49.025,95.675 51.495,98.145 DB1.3
NetC16_1: 
NetC17_1: 
NetD1_1: D1.1 R1.1 | length 3
  Top Layer w0.5: R1.1 D1.1
NetD2_1: D2.1 R2.1 | length 4.2
  Top Layer w1: R2.1 D2.1
NetD3_1: D3.1 P4.2 Q1.C R38.1 | length 16.9
  Top Layer w1: Q1.C 100.947,111.326 100.954,111.333 100.954,112.635 102.381,114.062 104.461,114.062 107.025,116.626 P4.2 107.025,120.8 106.369,121.456 106.05,121.775 106.05,122.948 D3.1
NetD4_2: D4.2 L1.1 U1.2 | length 51.8
  Top Layer w1: U1.2 29.134,78.41 28.448,77.724 24.257,77.724 23.368,76.835 23.368,66.548 25.146,64.77 42.923,64.77 L1.1 50.857,66.478 D4.2
NetD9_1: D9.1 R8.1 | length 3.4
  Top Layer w1: R8.1 D9.1
NetD11_1: 
NetD11_2: 
NetD12_1: 
NetD12_2: 
NetD13_1: D13.1 P10.1 R59.1 | length 15.5
  Top Layer w0.4: D13.1 62.06,40.328 62.06,44.026 62.364,44.33 P10.1
  Top Layer w0.5: D13.1@62.06,40.328 R59.1
NetD13_1_1: 
NetD14_1: NC.1@90.168,40.323 NC.1@93.975,40.35 | length 3.8
  Top Layer w0.5: NC.1@90.168,40.323 90.182,40.337 93.961,40.337 NC.1@93.975,40.35
NetD15_1: D15.1 R61.1 | length 3.7
  Top Layer w0.5: D15.1 R61.1
NetD16_1: 
NetD17_1: 
NetD18_1: 
NetIC1_6: 
NetIC1_7: 
NetJ6_2: J6.2 J6.7 R27.1 | length 33.9
  Top Layer w0.5: R27.1 19.939,17.611 21.625,15.925 27.101,15.925 J6.7
  Top Layer w2: J6.2 J6.7
NetJ6_4: J6.4 J6.8 R42.1 | length 29
  Top Layer w0.5: J6.8 33.425,21.797 33.425,26.475 35.675,28.725 37.775,28.725 41.656,32.606 R42.1
  Top Layer w2: J6.8 J6.4
NetJ6_5: J6.5 R57.1 | length 47
  Top Layer w0.5: J6.5 58.826,22.45 65.675,22.45 67.4,24.175 67.4,26.8 v2(67.5,26.9) ; R57.1 50.522,33.147 v2@50.7,33.325
  Bottom Layer w0.5: v2@50.781,33.15 50.981,32.95 50.989,32.95 52.039,31.9 62.5,31.9 v2(67.5,26.9)
  other v2: 50.75,33.1
NetJ6_6: J6.6 J6.11 R4.1 | length 16.3
  Top Layer w0.5: J6.11 24.473,25.173 27.686,28.386 R4.1
  Top Layer w2: J6.6 J6.11
NetJ6_10: J6.10 K9.2 K9.4 | length 24.4
  Bottom Layer w1.4: J6.10 53.205,18.873 54.025,18.053 54.025,13.175 56.39,10.81 K9.2
NetJ6_12: J6.12 K9.1 K9.3 K11.1 K11.3 R6.1 | length 73.9
  Top Layer w0.5: J6.12 34.925,30.049 R6.1
  Bottom Layer w1.4: J6.12 30.049,26.699 32.225,28.875 54.225,28.875 59.615,23.485 K9.3 K9.1 K11.1@81.7,15.85
NetJ6_13: J6.13
NetJ6_15: J6.15 K11.2 K11.4 | length 58.1
  Top Layer w1.4: J6.15 63.698,25.173 v2(63.9,25.375)
  Bottom Layer w1.4: v2(63.9,25.375) 64.5,24.775 83.53,24.775 84.35,23.955 84.35,13.625 K11.2 K11.4
  other v2: 64.575,25.55
NetJ7_2: 
NetJ7_4: 
NetJ7_5: 
NetJ7_6: 
NetJ7_10: 
NetJ7_12: 
NetJ7_13: 
NetJ7_15: 
NetJP1_7: 
NetJP4_2: 
NetJP4_3: 
NetM1_1: 
NetM1_3: 
NetM1_11: 
NetM1_12: 
NetM1_15: 
NetM1_16: 
NetP2_1: 
NetP3_1: 
NetP5_1: P5.1 R27.2 | length 10.1
  Top Layer w0.5: R27.2 19.939,43.209 P5.1
NetP6_1: P6.1 R4.2 | length 9.8
  Top Layer w0.5: R4.2 27.686,43.806 P6.1
NetP7_1: P7.1 R6.2 | length 8.8
  Top Layer w0.5: R6.2 P7.1@34.925,44.27
NetP8_1: P8.1 R42.2 | length 10
  Top Layer w0.5: R42.2 41.656,44.026 P8.1
NetP9_1: P9.1 R57.2 | length 10.1
  Top Layer w0.5: R57.2 49.149,44.644 P9.1
NetP10_1: 
NetP11_1: 
NetP12_1: 
NetP13_1: 
NetP14_1: 
NetP17_1: 
NetP17_3: 
NetP19_1: 
NetP19_2: 
NetQ1_B: Q1.B R40.2 R43.2 | length 15.6
  Top Layer w0.6: Q1.B 103.204,110.497 103.296,110.497 104.232,111.433 110.158,111.433 R40.2
  Top Layer w1: R40.2@113.525,115.05 R43.2
NetU20_2: 
NetU20_3: 
Q: 
R_CLK: 
R_DIO: 
R_STB: 
R_TER: 
RELAY9: U2.4 U4.IO4 | length 81.9
  Top Layer w0.254: U2.4 73.153,58.928 86.6,72.375 86.6,76.2 95.45,85.05 120.25,85.05 131.225,74.075 136.431,74.075 U4.IO4
RELAY10: U2.3
RELAY11: U2.2 | length 0.9
  Top Layer w0.254: U2.2 U2.2@73.091,56.388
RESET: 
RIN_B1: 
RIN_B2: 
RIN_B3: 
RIN_B4: 
RIN_B5: 
ROTARY_A: 
ROTARY_A1: P3.4 U4.IO15 | length 29.5
  Top Layer w0.254: P3.4 126.825,63.35 132.455,68.98 136.416,68.98 U4.IO15
ROTARY_B: 
ROTARY_B1: P3.2 U4.IO16 | length 30.6
  Top Layer w0.254: P3.2 125,59.35 133.455,67.805 U4.IO16
RST: J7.RST U4.IO9 | length 40.5
  Top Layer w0.254: v1(133.1,37.025) 134.85,37.025 136.45,38.625 136.45,52.425 138.025,54 v1(138.025,54.15) ; U4.IO9 140.875,60.123 v1(140.875,56.775)
  Bottom Layer w0.254: J7.RST@126.825,26.9 J7.RST 127.85,28.06 127.85,31.59 133.1,36.84 v1(133.1,37.025) ; v1(138.025,54.15) 140.65,56.775 v1(140.875,56.775)
RSW_A1: 
RSW_A2: 
RSW_A3: 
RXD0: P12.5 U4.RXD0 | length 20.9
  Top Layer w0.254: U4.RXD0 153.998,72.825 v1(156.825,72.825)
  Bottom Layer w0.254: P12.5 149.965,85.914 150.315,85.564 150.315,85.51 158.025,77.8 158.025,74.075 156.825,72.875 v1(156.825,72.825)
SCL: J7.SCL U4.IO12 | length 43.6
  Top Layer w0.254: v1(140.55,51.85) 144.639,55.939 U4.IO12
  Bottom Layer w0.254: J7.SCL 116.53,29.777 116.852,30.1 116.852,30.209 121.234,34.591 138.493,51.85 v1(140.55,51.85)
SDA: J7.SDA U4.IO13 | length 47.2
  Top Layer w0.254: v1(140.325,49.75) 145.892,55.317 U4.IO13
  Bottom Layer w0.254: J7.SDA 117.825,28.195 117.825,30.2 137.375,49.75 v1(140.325,49.75)
SPI_MISO: 
SPI_MOSI: 
SPI_SCK: 
TXD0: P12.4 U4.TXD0 | length 19.3
  Top Layer w0.254: U4.TXD0 154.033,74.25 v1(155.85,74.25)
  Bottom Layer w0.254: P12.4 147.425,86.588 148.108,85.905 148.295,85.905 157.05,77.15 157.05,75.45 v1(155.85,74.25)
VCC: C3.1 C10.1 C13.2 C34.1 L1.2 P15.3 R1.2 R3.2 R5.2 R36.2 R41.2 R56.2 R62.1 R63.1 R64.1 R65.1 U1.4 U3.VCC U5.3 | length 325.2
  Top Layer w1: R5.2 24.257,57.718 v2(25.15,56.825) ; R3.2 31.242,57.858 v2(32.325,56.775) ; 32.028,76.378 32.538,76.888 U1.4 ; R36.2 38.227,57.898 v2(39.325,56.8) ; R41.2 45.212,57.913 v2@46.275,56.85 ; R56.2 52.197,58.078 v2(53.325,56.95) ; v1(81.9,58.075) 82.357,58.532 U3.VCC@84.559,58.532 ; U3.VCC U3.VCC@84.559,58.532 ; R65.1 96.85,52.242 93.988,52.242 90.925,52.242 89.381,52.242 87.675,53.948 87.675,54.202 87.54,54.337 86.983,54.337 84.559,56.761 ; 103.575,41.685 100.54,41.685 98.95,43.275 94.6,43.275 84.559,53.316 84.559,56.761 ; 84.559,56.761 U3.VCC@84.559,58.532
  Top Layer w1.2: 103.575,41.685 C34.1@106.715,44.825
  Top Layer w1.5: C10.1 96.999,103.65 103.649,103.65 U5.3 106.624,100.825 113.299,107.5 v1(118.5,107.5)
  Top Layer w2: R1.2 28.139,67.564 30.226,69.651 C3.1 30.226,74.576 32.028,76.378 L1.2 ; C34.1@106.715,44.825 C34.1
  Bottom Layer w1.2: v2(53.325,56.95) 80.775,56.95 v1(81.9,58.075)
  Bottom Layer w1.5: v1@118.373,107.627 v1(118.5,107.5) 140.224,107.5 P15.3@152.885,120.161
  Bottom Layer w2: v2@53.34,56.825 v2(25.15,56.825) 30.226,61.901 C3.1 30.226,76.551 32.975,79.3 84.85,79.3 92.325,86.775 92.325,95.105 91.65,95.78 91.65,98.301 C10.1
  other v2: 46.325,56.65
W_DC24V: 
W_GND: 
WAIT: J7.WAT U4.IO11 | length 43.7
  Top Layer w0.254: v1(139.075,47.8) 139.075,52.175 v1(143.314,56.414) 143.352,56.452 U4.IO11
  Bottom Layer w0.254: J7.WAT 120.35,28.18 120.35,29.703 138.447,47.8 v1(139.075,47.8)
WR: J7.WR U4.IO46 | length 37.8
  Top Layer w0.254: J7.WR 130.5,28.17 130.5,30.3 137.675,37.475 137.675,52.05 139.559,53.934 U4.IO46
  Bottom Layer w0.254: J7.WR J7.WR@129.5,26.9
X_ASTB: 
X_BSTB: 
X_CLK: 
X_CSTB: 
X_DIO: 
X_DSTB: 
X_ESTB: 
X_FSTB: 
X_GSTB: 
X_SW_1: 
X_SW_2: 
X_SW_3: 
X_SW_4: 
pads on no net: "U3.QH\"" J3.3 J4.2 J7.NC J7.T_IN NC.1@95.385,15.725 NC.2@95.385,10.685 NC.3 NC.4 P3.1 P15.1 U1. U2.1 U2.5 U2.6 U2.7 U2.8 U2.11 U2.12 U2.18 U3.D3 U4.IO19 U4.IO20 U5.4

## Polygon pours and split planes (outlines as drawn)
GND on Bottom Layer "NONET_L-01_P-001" (solid, pour order 1): 137.75,119.775 137.925,119.95 159.4,119.95 164.275,115.075 164.275,30.25 155.125,21.1 112.55,21.1 112.55,95.075 114.6,97.125
GND on Top Layer "NONET_L-01_P-001" (solid, pour order 0): 124.55,106.475 137.85,119.775 159.8,119.775 163.875,115.125 163.875,114.3 163.875,30.225 154.9,21.25 114.575,21.25 111.838,22.879 111.838,31.55 112.375,94.575 124.825,107.025

## Keep-outs
Keep-Out Layer:
  circle w0.254: c10,10 r2.5
  circle w0.254: c10,118 r2.5
  circle w0.254: c125,10 r2.5
  circle w0.254: c125,118 r2.5
  lines w0.254: 0,0 166.225,0 166.225,128 0,128 0,0

## Silkscreen, mask and mechanical layers (free items; w line width, h text height)
Top Overlay:
  circle w0.254: c10,10 r4.5
  circle w0.254: c10,118 r4.5
  circle w0.254: c125,10 r4.5
  circle w0.254: c125,118 r4.5
  text "按钮" at 103.599,84.311 h2
  text "旋钮" at 107.624,53.039 h2
  text "-" at 74.004,46.204 h1
  text "+" at 74.004,43.712 h1
  text "ver2.1.1轩23/5/20" at 147.936,1.9 h2

## Text inside footprints (layer, text, board x,y; h text height)
J7: Top Overlay "2" at 107.64,27.281 h1 r180; Top Overlay "1" at 107.767,30.202 h1 r180; Top Overlay "33" at 160.472,29.821 h1 r180; Top Overlay "34" at 160.091,27.154 h1 r180